# Altium PCB STM32F_Board_PCB.PcbDoc (part 1 of 2)
Units mm, origin at the board's own origin, x right, y up, seen from the top; angles counter-clockwise.
Board outline 53.26 x 36.83 mm, 2 copper layers (Top Layer, Bottom Layer), stack 1.549 mm thick; 46 components, 35 nets, 187 pads, 21 vias.
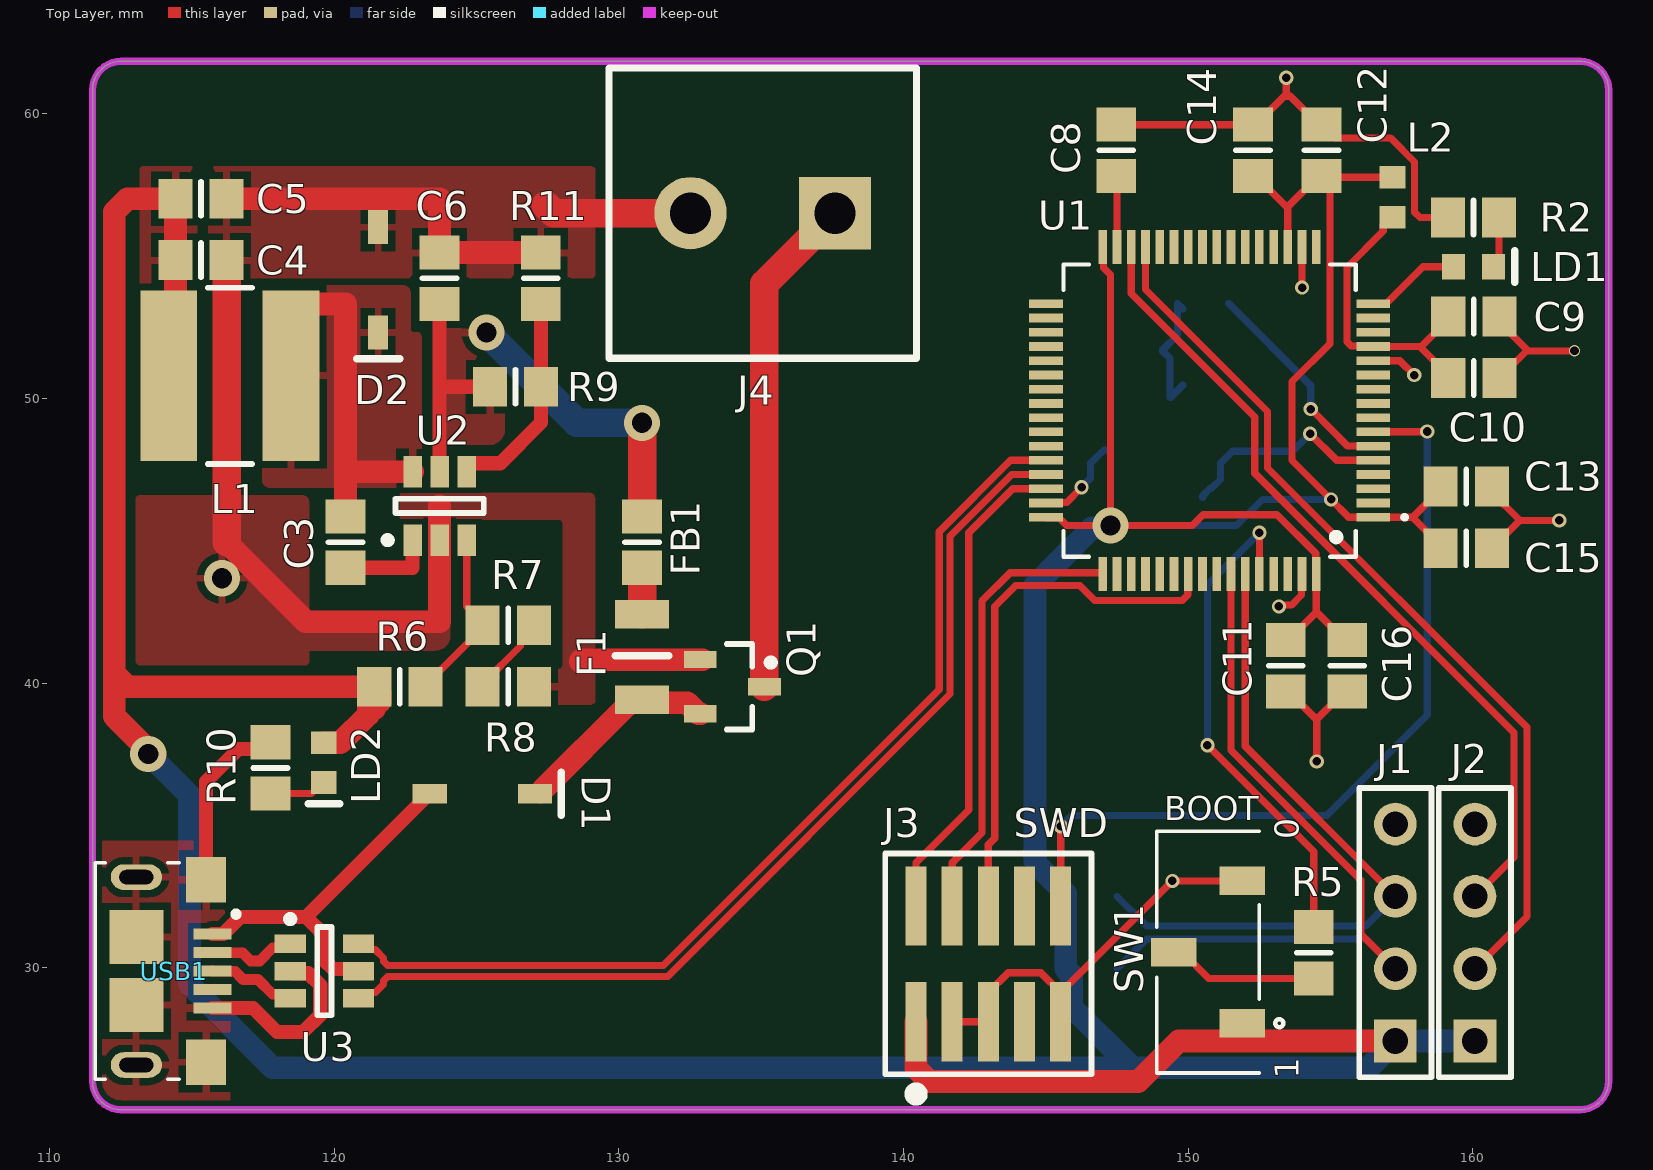
[diagram p0: Top Layer view]
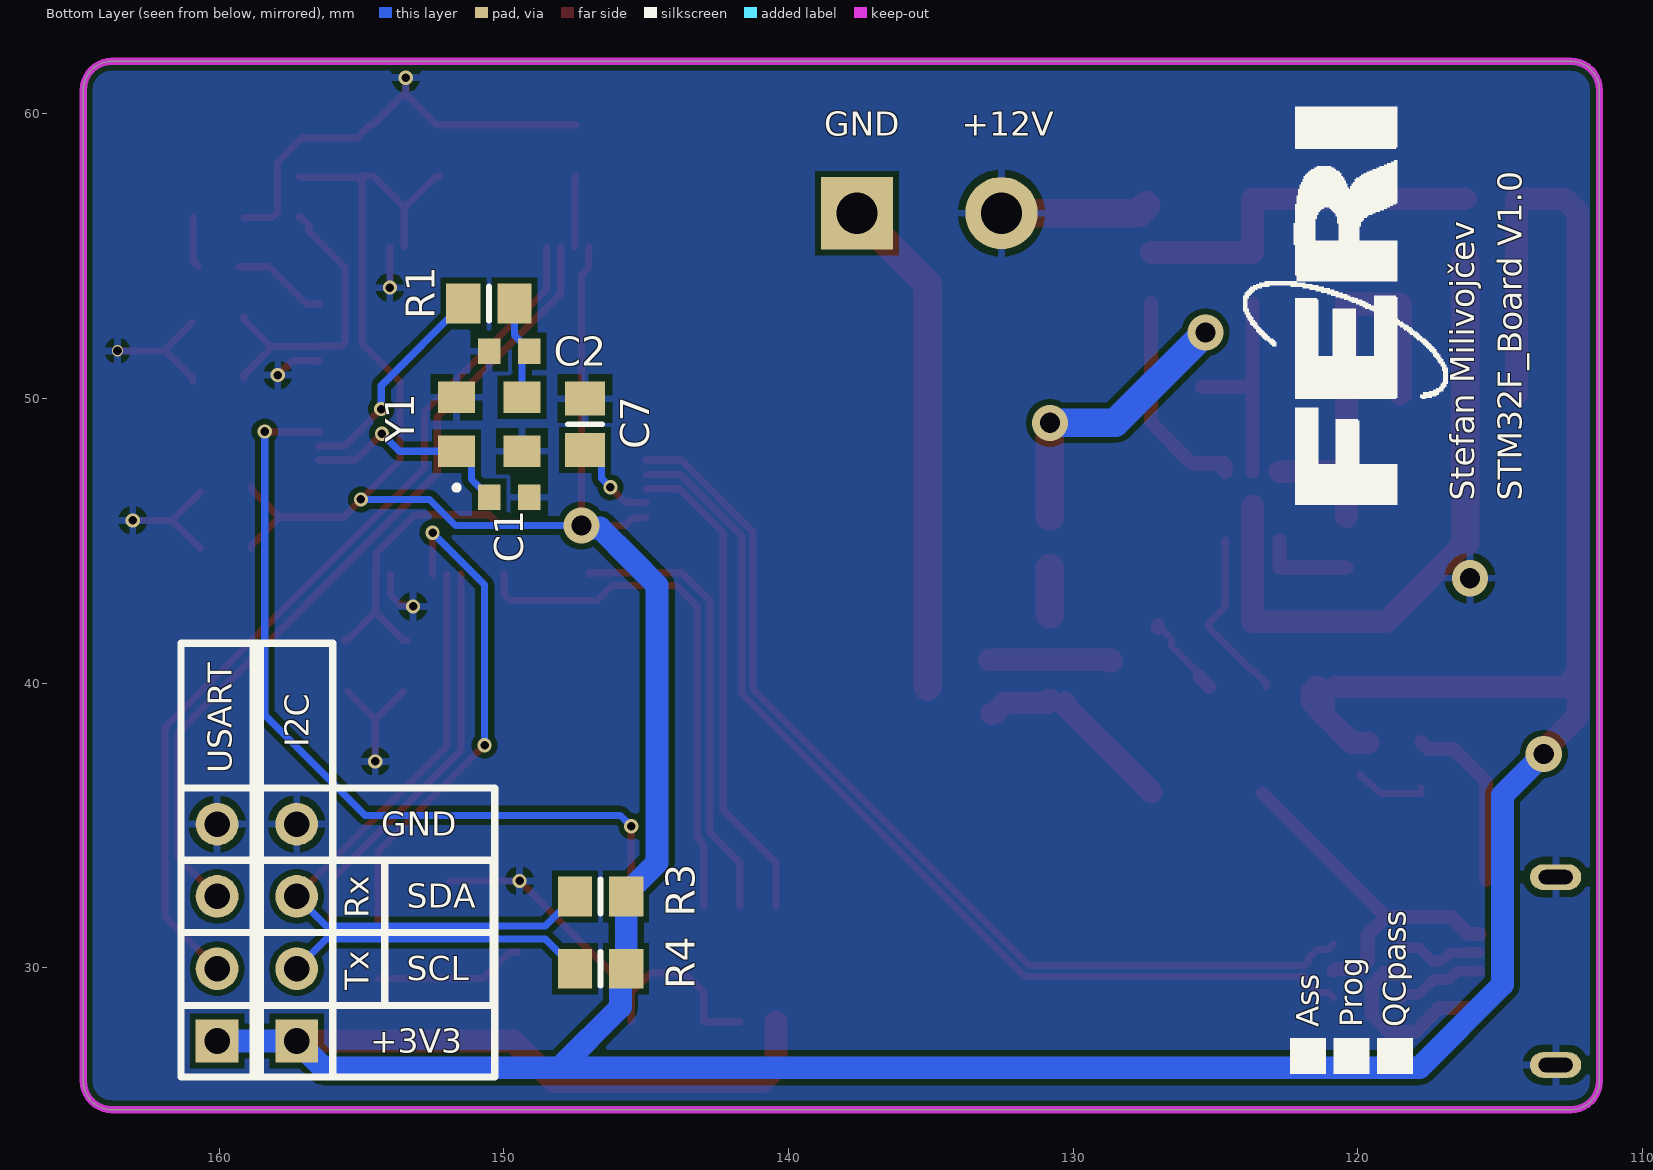
[diagram p1: Bottom Layer view, seen from below]
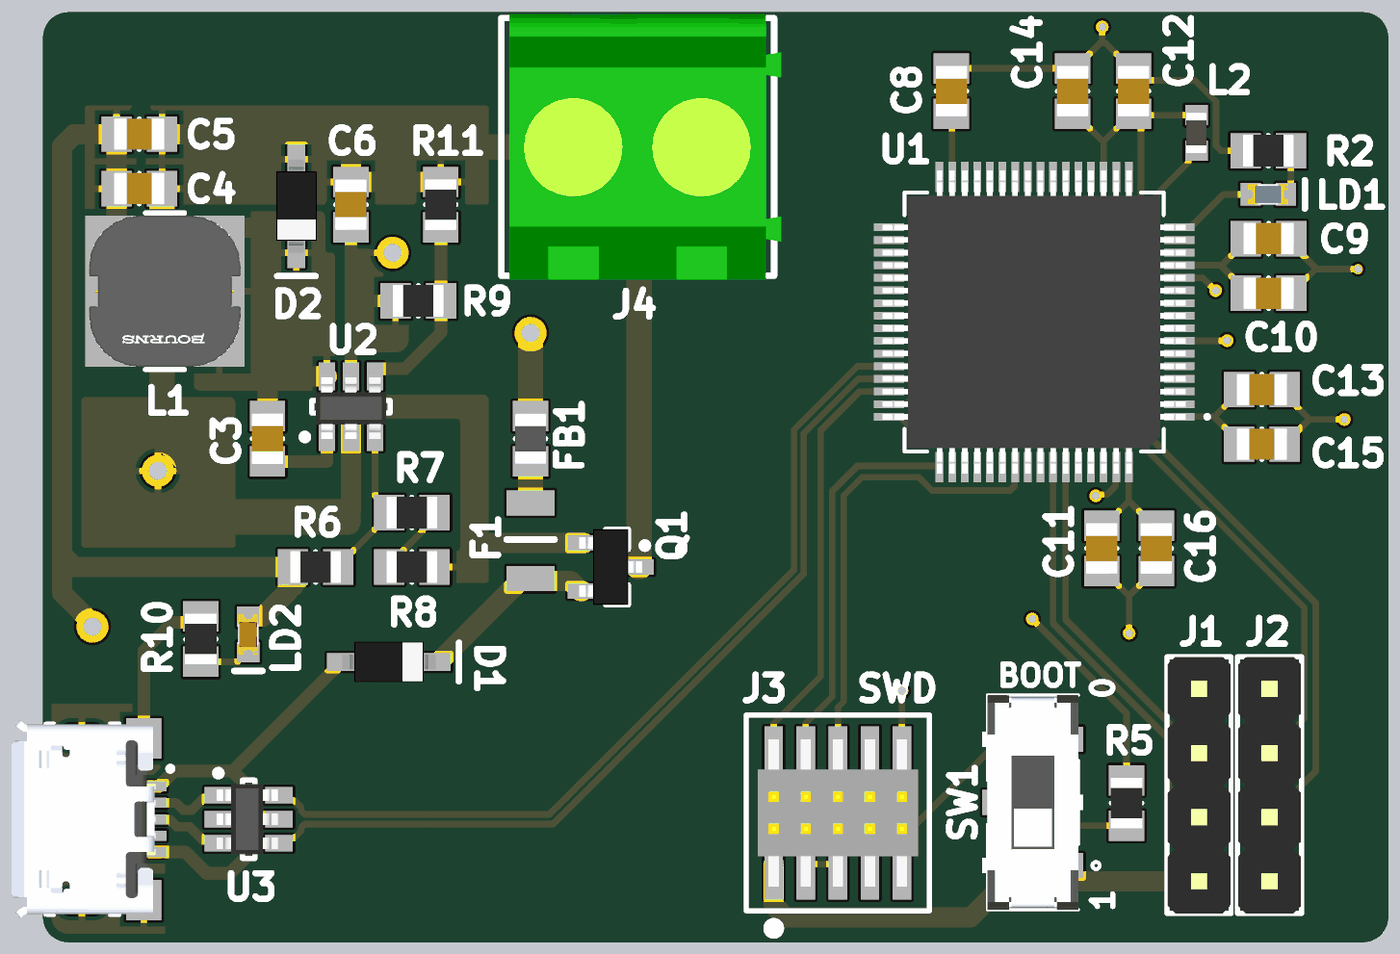
[diagram p2: 3D render of the assembled board from above, using the file's embedded part models]
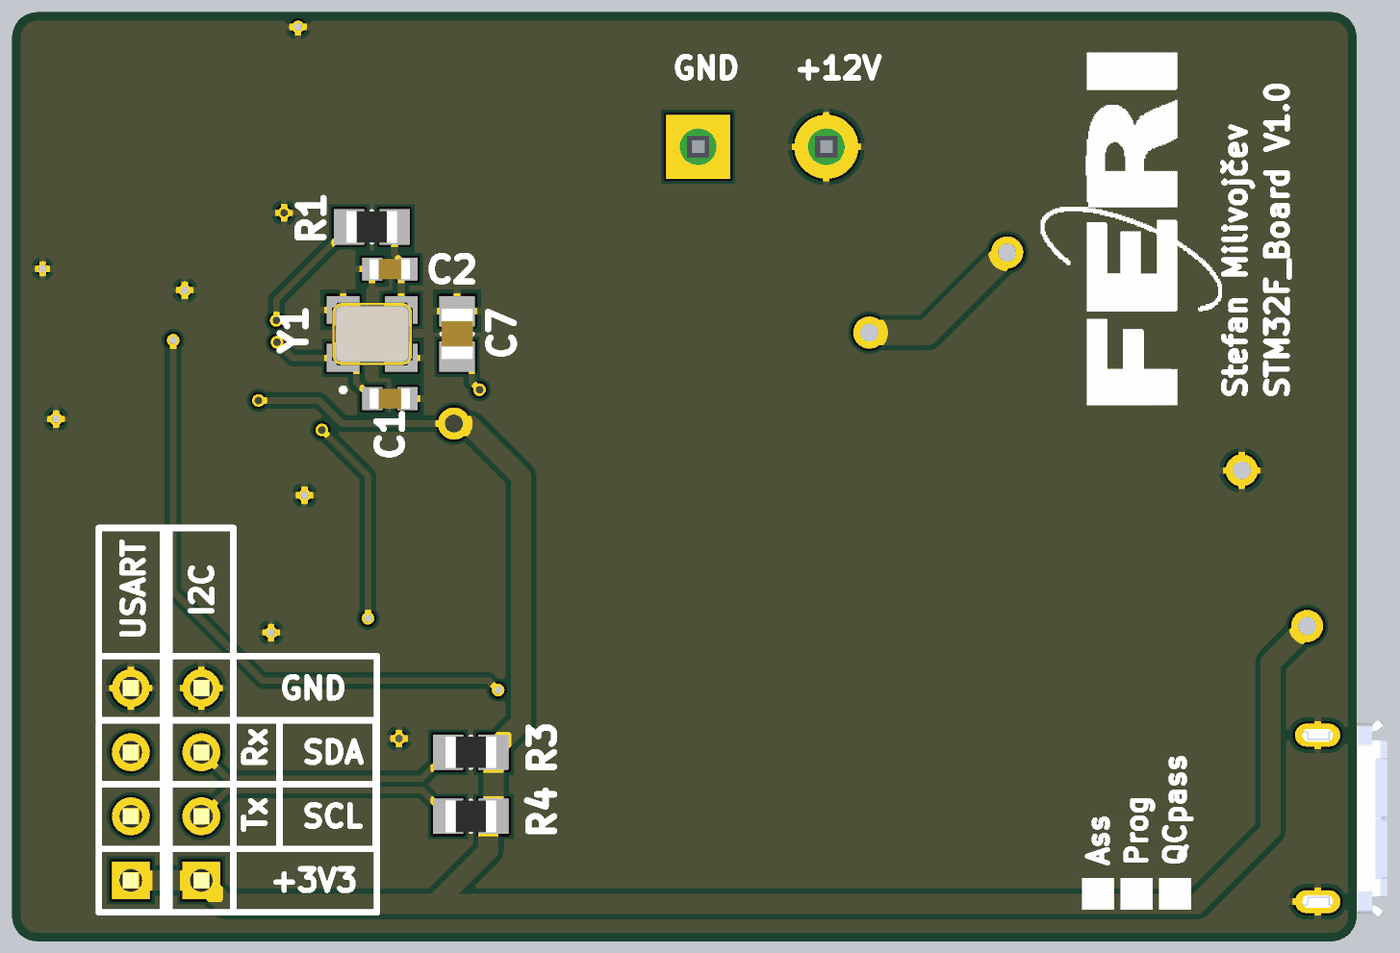
[diagram p3: 3D render of the assembled board from below, using the file's embedded part models]

## Layer stack, top to bottom
Top Solder: solder mask 0.0254, SM-001, Dk 4
Top Layer: signal copper 0.035
Dielectric 1: dielectric 1.4792, FR-4, Dk 4.6
Bottom Layer: signal copper 0.035
Bottom Solder: solder mask 0.0254, SM-001, Dk 4

## Board outline
111.506,26.019 111.506,60.849 cw(c112.506,60.849) 112.506,61.849 163.77,61.849 cw(c163.77,60.849) 164.77,60.849 164.77,26.019 cw(c163.77,26.019) 163.77,25.019 112.506,25.019 cw(c112.506,26.019)

## Design rules (kind name [scope] priority, off if disabled: settings)
Clearance [All] p1: gap=0.2 ignorepadtopadclearanceinfootprint=FALSE except(0.127: Arc-Arc Arc-Track Track-Track SMDPad-SMDPad; 0.254: Arc-Via Arc-Hole Track-Via Track-Hole Via-Via; 0.33: Arc-THPad Track-THPad)
DiffPairsRouting [All] p1: maxlimit=0.254 minlimit=0.127 mostfreqgap=0.254 toplayer_minwidth=0.127 toplayer_maxwidth=0.381 toplayer_prefwidth=0.381 bottomlayer_minwidth=0.127 bottomlayer_maxwidth=0.381 bottomlayer_prefwidth=0.381 maxuncoupledlength=12.7
HoleSize [All] p1: absolutevalues=TRUE maxlimit=5 minlimit=0.2 maxpercent=80.000 minpercent=20.000
MinimumSolderMaskSliver [All] p1: minsoldermaskwidth=0.045
PolygonConnect [All] p1: connectstyle=Relief reliefconductorwidth=0.254 reliefentries=4 polygonreliefangle="90 Angle" airgapwidth=0.254
RoutingVias [All] p1: holewidth=0.711 width=1.27 viastyle="Through Hole" minholewidth=0.2 minwidth=0.4 maxholewidth=0.711 maxwidth=1.27
SilkToSilkClearance [All] p1: silktosilkclearance=0.15
SilkToSolderMaskClearance [IsPad] p1: minsilkscreentomaskgap=0.15 clearancetoexposedcopper=TRUE
SolderMaskExpansion [All] p1: expansion=0.102 istentingtop=FALSE
Width [All] p1: maxlimit=1 minlimit=0.127 preferedwidth=0.254
25 further rules are at their usual default settings.

## Classes and differential pairs
component class STM32F_Board_Schematic: C1 C2 J1 J2 J3 LD1 R1 R2 R3 R4 R5 SW1 U1 Y1
component class STM32F_Board_Schematic_PowerAndUSB: C3 C4 C5 C6 C7 C8 C9 C10 C11 C12 C13 C14 C15 C16 D1 D2 F1 FB1 J4 L1 L2 LD2 Q1 R6 R7 R8 R9 R10 R11 U2 U3 USB1
differential pair USB_IN: +USB_IN_P -USB_IN_N
differential pair USB_DATA: +USB_DATA_P -USB_DATA_N

## Components (designator, comment, footprint, x,y, rotation, side; value= is the part's Value field where it differs from the comment)
C1 "12pF" Capacitor_0603IMP 149.806,46.533 r0 bottom
C2 "12pF" Capacitor_0603IMP 149.806,51.664 r0 bottom
C3 "10nF" Capacitor_0805IMP 120.396,44.958 r270 top
C4 "10uF" Capacitor_0805IMP 115.316,54.864 r180 top
C5 "10uF" Capacitor_0805IMP 115.316,57.023 r180 top
C6 "10uF" Capacitor_0805IMP 123.698,54.229 r270 top
C7 "2.2uF" Capacitor_0805IMP 147.142,49.098 r270 bottom
C8 "2.2uF" Capacitor_0805IMP 147.472,58.725 r270 top
C9 "1uF" Capacitor_0805IMP 160.034,52.883 r180 top
C10 "10nF" Capacitor_0805IMP 160.034,50.724 r180 top
C11 "4.7uF" Capacitor_0805IMP 153.424,40.615 r90 top
C12 "100nF" Capacitor_0805IMP 154.686,58.725 r270 top
C13 "100nF" Capacitor_0805IMP 159.766,46.907 r180 top
C14 "100nF" Capacitor_0805IMP 152.273,58.725 r270 top
C15 "100nF" Capacitor_0805IMP 159.766,44.744 r180 top
C16 "100nF" Capacitor_0805IMP 155.586,40.615 r270 top
D1 "1N5819HW-7-F" SOD-123 123.351,36.119 r0 top
D2 "1N5819HW-7-F" SOD-123 121.539,56.024 r270 top
F1 "250mA" PTCFuse_1206IMP 130.81,39.418 r90 top
FB1 "600R" FerriteBead_0805IMP 130.81,44.958 r90 top
J1 "Header_Male_1x4" HDR1X4 157.277,27.432 r90 top
J2 "Header_Male_1x4" HDR1X4 160.071,27.432 r90 top
J3 "SWD" SAMTEC-FTS-105-01-X-DV 142.977,30.141 r0 top
J4 "MC000048" Screw_Terminal_1x2 135.052,56.515 r180 top
L1 "10uH" BournsInductor 116.332,50.8 r180 top
L2 "39nH" Inductor_0603IMP 157.175,57.074 r270 top
LD1 "Blue" LED_0603IMP_BLUE 160.02,54.635 r0 top
LD2 "Red" LED_0603IMP_RED 119.634,37.211 r270 top
Q1 "AO3401A" SOT23_N 133.985,39.878 r0 top
R1 "47R" Resistor_0805IMP 150.52,53.34 r0 bottom
R2 "1.5kR" Resistor_0805IMP 160.02,56.363 r0 top
R3 "2.2kR" Resistor_0805IMP 146.598,32.512 r180 bottom
R4 "2.2kR" Resistor_0805IMP 146.598,29.972 r180 bottom
R5 "10kR" Resistor_0805IMP 154.407,30.531 r270 top
R6 "47kR" Resistor_0805IMP 122.301,39.878 r180 top
R7 "15kR" Resistor_0805IMP 126.111,42.037 r180 top
R8 "270R" Resistor_0805IMP 126.111,39.878 r180 top
R9 "100kR" Resistor_0805IMP 126.365,50.419 r180 top
R10 "1kR" Resistor_0805IMP 117.754,37.024 r270 top
R11 "68kR" Resistor_0805IMP 127.254,54.229 r270 top
SW1 "SPDT" SW_JS102011JCQN 150.698,30.556 r90 top
U1 "STM32F405RGT6" LQFP64-10x10mm 150.749,49.581 r180 top
U2 "MP2359DJ-LF-P" SOT23-6_N 123.698,46.228 r90 top
U3 "USBLC6-2SC6" SOT23-6_N 119.649,29.89 r0 top
USB1 "Micro B" FCI_10118193-0001LF 113.045,29.89 r270 top
Y1 "16MHz" Oscillator_3225 150.506,49.098 r180 bottom

## Footprints (in the part's own frame and the unit in brackets; to place one, negate y for a bottom-side part, rotate by r counter-clockwise, add the part's x,y. Pads: shape width x height; smd on the part's side, far side on the other; paste and mask are expansions set on the pad)
BournsInductor [mm]
  rect 2x6 smd paste+0 mask+0: 1(-2.15,0) 2(2.15,0)
  silkscreen extent -0.77,-3.1 0.77,3.1, body extent -3.25,-3.2 3.25,3.2, height 0.25
Capacitor_0603IMP [mm] "Chip Capacitor, Body 1.6x0.8mm, IPC High Density"
  rect 0.8x0.9 smd: 1(-0.7,0) 2(0.7,0)
  body extent -0.8,-0.4 0.8,0.4, height 0.9
Capacitor_0805IMP [mm] "Chip Resistor, Body 2.0x1.2mm, IPC Medium Density"
  rect 1.2x1.4 smd: 1(-0.9,0) 2(0.9,0)
  silkscreen extent 0,-0.6 0,0.6, body extent -1,-0.62 1,0.62, height 1
FCI_10118193-0001LF [mm]
  rect 0.4x1.35 smd: 1(-1.3,2.675) 2(-0.65,2.675) 3(0,2.675) 4(0.65,2.675) 5(1.3,2.675)
  rect 1.6x1.4 smd: S1(-3.2,2.45) S2(3.2,2.45)
  rect 1.9x1.9 smd: S3(1.2,0) S4(-1.2,0)
  oval 0.9x1.8 hole 0.5 slot 1.2 at 90 deg: S5(-3.3,0) S6(3.3,0)
  silkscreen extent -3.8,-1.45 3.8,3.6, body extent -3.93,-2.79 3.93,2.92, height 2.84
FerriteBead_0805IMP [mm] "Chip Resistor, Body 2.0x1.2mm, IPC Medium Density"
  rect 1.2x1.4 smd: 1(-0.9,0) 2(0.9,0)
  silkscreen extent 0,-0.6 0,0.6, body extent -1,-0.62 1,0.62, height 1.05
HDR1X4 [mm] "Connector; Header; 4 Position"
  rect 1.5x1.5 hole 0.9: 1(0,0)
  round 1.5 hole 0.9: 2(2.54,0) 3(5.08,0) 4(7.62,0)
  silkscreen extent -1.27,-1.27 8.89,1.27, body extent -1.27,-1.24 8.89,1.25, height 8.54
Inductor_0603IMP [mm] "Chip Capacitor, Body 1.6x0.8mm, IPC High Density"
  rect 0.8x0.9 smd: 1(-0.7,0) 2(0.7,0)
  body extent -0.8,-0.4 0.8,0.4, height 0.8
LED_0603IMP_BLUE [mm] "Chip Capacitor, Body 1.6x0.8mm, IPC High Density"
  rect 0.8x0.9 smd: 1(-0.7,0) 2(0.7,0)
  silkscreen extent 1.45,-0.56 1.45,0.56, body extent -0.8,-0.4 0.8,0.4, height 0.6
LED_0603IMP_RED [mm] "Chip Capacitor, Body 1.6x0.8mm, IPC High Density"
  rect 0.8x0.9 smd: 1(-0.7,0) 2(0.7,0)
  silkscreen extent 1.45,-0.56 1.45,0.56, body extent -0.8,-0.4 0.8,0.4, height 0.6
LQFP64-10x10mm [mm]
  rect 1.194x0.305 smd paste+0 mask+0: 1(-5.75,3.75) 2(-5.75,3.25) 3(-5.75,2.75) 4(-5.75,2.25) 5(-5.75,1.75) 6(-5.75,1.25) 7(-5.75,0.75) 8(-5.75,0.25) 9(-5.75,-0.25) 10(-5.75,-0.75) 11(-5.75,-1.25) 12(-5.75,-1.75) 13(-5.75,-2.25) 14(-5.75,-2.75) 15(-5.75,-3.25) 16(-5.75,-3.75) 33(5.75,-3.75) 34(5.75,-3.25) 35(5.75,-2.75) 36(5.75,-2.25) 37(5.75,-1.75) 38(5.75,-1.25) 39(5.75,-0.75) 40(5.75,-0.25) 41(5.75,0.25) 42(5.75,0.75) 43(5.75,1.25) 44(5.75,1.75) 45(5.75,2.25) 46(5.75,2.75) 47(5.75,3.25) 48(5.75,3.75)
  rect 0.305x1.194 smd paste+0 mask+0: 17(-3.75,-5.75) 18(-3.25,-5.75) 19(-2.75,-5.75) 20(-2.25,-5.75) 21(-1.75,-5.75) 22(-1.25,-5.75) 23(-0.75,-5.75) 24(-0.25,-5.75) 25(0.25,-5.75) 26(0.75,-5.75) 27(1.25,-5.75) 28(1.75,-5.75) 29(2.25,-5.75) 30(2.75,-5.75) 31(3.25,-5.75) 32(3.75,-5.75) 49(3.75,5.75) 50(3.25,5.75) 51(2.75,5.75) 52(2.25,5.75) 53(1.75,5.75) 54(1.25,5.75) 55(0.75,5.75) 56(0.25,5.75) 57(-0.25,5.75) 58(-0.75,5.75) 59(-1.25,5.75) 60(-1.75,5.75) 61(-2.25,5.75) 62(-2.75,5.75) 63(-3.25,5.75) 64(-3.75,5.75)
  silkscreen extent -6.93,-5.13 5.13,5.13, body extent -6,-6 6,6, height 1.56
Oscillator_3225 [mm]
  rect 1.3x1.1 smd: 1(-1.15,-0.95) 2(1.15,-0.95) 3(1.15,0.95) 4(-1.15,0.95)
  silkscreen extent -1.2,-2.28 -1.1,-2.17, body extent -1.6,-1.26 1.6,1.24, height 0.6
PTCFuse_1206IMP [mm]
  rect 1x1.9 smd: 1(0,0) 2(3,0)
  silkscreen extent 1.55,-0.95 1.55,0.95, body extent -0.2,-0.85 3.2,0.85, height 0.8
Resistor_0805IMP [mm] "Chip Resistor, Body 2.0x1.2mm, IPC Medium Density"
  rect 1.2x1.4 smd: 1(-0.9,0) 2(0.9,0)
  silkscreen extent 0,-0.6 0,0.6, body extent -1,-0.63 1,0.63, height 0.6
SAMTEC-FTS-105-01-X-DV [mil]
  rect 29.13x109.84 smd: 1(-100,-80) 2(-100,80) 3(-50,-80) 4(-50,80) 5(0,-80) 6(0,80) 7(50,-80) 8(50,80) 9(100,-80) 10(100,80)
  silkscreen extent -143,-191 143,153, body extent -125,-115 125,115, height 170
Screw_Terminal_1x2 [mm]
  rect 2.54x2.54 hole 1.45: 1(-2.54,0)
  round 2.54 hole 1.45: 2(2.54,0)
  silkscreen extent -5.4,-5.1 5.4,5.1, body extent -5.68,-5.25 5.08,5.25, height 14.29
SOD-123 [mm]
  rect 1.2x0.7 smd: 1(0,0) 2(3.7,0)
  silkscreen extent 4.62,-0.76 4.62,0.76, body extent 0,-0.8 3.7,0.8, height 1.27
SOT23-6_N [mm] "SOT23, 6-Leads, Body 2.9x1.6mm, Pitch 0.95mm, Lead Span 2.7mm, IPC Medium Density"
  rect 1.1x0.65 smd: 1(-1.2,0.95) 2(-1.2,0) 3(-1.2,-0.95) 4(1.2,-0.95) 5(1.2,0) 6(1.2,0.95)
  silkscreen extent -1.32,-1.55 0.25,1.95, body extent -1.27,-1.4 1.16,1.4, height 1.09
SOT23_N [mm] "SOT23, 3-Leads, Body 2.9x1.3mm, Pitch 0.95mm, Lead Span 2.3mm - Reverse Pinning, IPC Medium Density"
  rect 1.15x0.6 smd: 1(1.125,0) 2(-1.125,-0.95) 3(-1.125,0.95)
  silkscreen extent -0.2,-1.5 1.48,1.5, body extent -1.25,-1.5 1.25,1.5, height 1.09
SW_JS102011JCQN [mm]
  rect 1x1.6 smd: 1(-2.5,-1.2) 2(0,1.2) 3(2.5,-1.2)
  silkscreen extent -4.25,-2.64 4.25,1.8, body extent -4.25,-2 4.25,2, height 5.39

## Part data
C1 C2: library part C_12pF_0603IMP, "Capacitor; Ceramic; Cap; 12.0pF; Tol 5%; SMT; Vol-Rtg 50V; C0G", Case/Package=0603, Dielectric=C0G, Dielectric Material=Ceramic, Manufacturer=KEMET, Manufacturer Part Number=C0603C120J5GACTU, Max Operating Temperature=125°C, Min Operating Temperature=-55°C, Supplier Part Number 1=1414612, Temperature Coefficient=30ppm/°C, Tolerance=5%, Voltage=50V, Capacitance=12pF, Category="Ceramic Capacitors", ComponentLink1Description=https://datasheet.ciiva.com/28608/1372242-28608539.pdf?src-supplier=Element14, ComponentLink1URL=https://datasheet.ciiva.com/28608/1372242-28608539.pdf?src-supplier=Element14, Depth=0.8mm, Height=0.8mm, Lead Free="Lead Free", Length=1.6mm, Mount="Surface Mount", Packaging="Tape and Reel", Pricing 1="10=0,03410, 100=0,02710, 500=0,01900, 1000=0,01440, 2000=0,01410 (GBP)", Radiation Hardening=No, RoHS=Yes, Stock 1=37802, Supplier 1=Farnell, Termination=SMD/SMT, Voltage Rating (DC)=50V
C3 C10: library part C_10nF_0805IMP, "Ceramic capacitor SMD 0805 10 nF 100 V 10 %", Case Code (Imperial)=0805, Case Code (Metric)=2012, Dielectric=X7R, Manufacturer=Samsung, Manufacturer Part Number=CL21B103KCANNNC, Max Operating Temperature=125°C, Min Operating Temperature=-55°C, Package Quantity=1, Supplier Part Number 1=3013472, Tolerance=10%, Voltage=100V, Capacitance=10nF, Case/Package=0805, Category="Ceramic Capacitors", ComponentLink1Description=https://datasheet.ciiva.com/15195/getdatasheetpartid-494350-15195869.pdf?src-supplier=Verical, ComponentLink1URL=https://datasheet.ciiva.com/15195/getdatasheetpartid-494350-15195869.pdf?src-supplier=Verical, ComponentLink2Description=https://datasheet.ciiva.com/29199/455069-da-01-en-vs-kondensator-0805-29199454.pdf?src-supplier=Conrad, ComponentLink2URL=https://datasheet.ciiva.com/29199/455069-da-01-en-vs-kondensator-0805-29199454.pdf?src-supplier=Conrad, ComponentLink3Description=https://datasheet.ciiva.com/26310/mlcc-catalogdownload2013-eng-26310214.pdf?src-supplier=Distrelec, ComponentLink3URL=https://datasheet.ciiva.com/26310/mlcc-catalogdownload2013-eng-26310214.pdf?src-supplier=Distrelec, ComponentLink4Description=https://datasheet.ciiva.com/16351/cl21b103kcannnc-16351132.pdf?src-supplier=Future+Electronics, ComponentLink4URL=https://datasheet.ciiva.com/16351/cl21b103kcannnc-16351132.pdf?src-supplier=Future+Electronics, Construction=Flat, Contact Plating=Tin, Depth=1.25mm, Height=0.65mm, Length=2mm, Material=Ceramic, Mount="Surface Mount", Packaging="Tape and Reel", Pricing 1="10=0,02170, 100=0,01760, 500=0,01220, 1000=0,00940, 2000=0,00920 (GBP)", Radiation Hardening=No, RoHS=Yes, RoHS Compliant=Yes, Series=CL, Stock 1=1127, Supplier 1=Farnell, Thickness=0.03inch, Voltage Rating=100V, Width=0.049inch
C4 C5 C6: library part C_10uF_0805IMP, "Capacitor, 10 µF, 25 V, 0805 [2012 Metric], ± 20%, X5R", Case Code (Imperial)=0805, Case Code (Metric)=2012, Dielectric=X5R, Manufacturer=Murata, Manufacturer Part Number=GRM21BR61E106MA73L, Max Operating Temperature=85°C, Min Operating Temperature=-55°C, Package Quantity=3000, Resistor Type=Ceramic, Supplier Part Number 1=2611941, Tolerance=20%, Voltage Rating=25V, Capacitance=10uF, Case/Package=0805, Category="Ceramic Capacitors", ComponentLink1Description=http://www.farnell.com/datasheets/2079185.pdf?src-supplier=Farnell, ComponentLink1URL=http://www.farnell.com/datasheets/2079185.pdf?src-supplier=Farnell, ComponentLink2Description=http://www.mouser.com/ds/2/281/c02e-2905.pdf?src-supplier=Mouser, ComponentLink2URL=http://www.mouser.com/ds/2/281/c02e-2905.pdf?src-supplier=Mouser, ComponentLink3Description=http://components.arrow.com/part/dataview/0323_03061623?src-supplier=Arrow+Europe, ComponentLink3URL=http://components.arrow.com/part/dataview/0323_03061623?src-supplier=Arrow+Europe, ComponentLink4Description=https://search.murata.co.jp/Ceramy/image/img/A01X/G101/ENG/GRM21BR61E106MA73-01.pdf?src-supplier=Digi-Key, ComponentLink4URL=https://search.murata.co.jp/Ceramy/image/img/A01X/G101/ENG/GRM21BR61E106MA73-01.pdf?src-supplier=Digi-Key, ComponentLink5Description=http://www.farnell.com/datasheets/2079185.pdf?src-supplier=Element14, ComponentLink5URL=http://www.farnell.com/datasheets/2079185.pdf?src-supplier=Element14, Depth=1.25mm, Height=1.25mm, Lead Free="Lead Free", Length=2mm, Mount="Surface Mount", Packaging="Tape and Reel", Pricing 1="10=0,13100, 100=0,09480, 500=0,06230, 2500=0,04730, 7500=0,03960, 15000=0,03940, 75000=0,03630, 150000=0,03560 (GBP)", REACH SVHC="No SVHC", RoHS=Yes, RoHS Compliant=Yes, Stock 1=205597, Supplier 1=Farnell, Termination=SMD/SMT, Thickness=0.055inch, Voltage Rating (DC)=25V, Weight=0.000335oz, Width=0.049inch
C7 C8: library part C_2.2uF_0805IMP, "Multilayer Ceramic Capacitor, C Series, 2.2 uF,  10%, X7R, 16 V, 0805 [2012 Metric]", Case Code (Imperial)=0805, Case Code (Metric)=2012, Dielectric=X7R, Dielectric Material=Ceramic, Manufacturer=TDK, Manufacturer Part Number=C2012X7R1C225K125AB, Max Operating Temperature=125°C, Min Operating Temperature=-55°C, Package Quantity=2000, Supplier Part Number 1=1907345, Tolerance=10%, Voltage=16V, Capacitance=2.2uF, Case/Package=0805, Category="Ceramic Capacitors", ComponentLink1Description=https://datasheet.ciiva.com/24219/c2012x7r1c225k125ab-265065-24219730.pdf?src-supplier=Mouser, ComponentLink1URL=https://datasheet.ciiva.com/24219/c2012x7r1c225k125ab-265065-24219730.pdf?src-supplier=Mouser, ComponentLink2Description=https://datasheet.ciiva.com/11788/0900766b80c1bb00-11788135.pdf?src-supplier=RSComponents, ComponentLink2URL=https://datasheet.ciiva.com/11788/0900766b80c1bb00-11788135.pdf?src-supplier=RSComponents, ComponentLink3Description=https://datasheet.ciiva.com/26834/getdatasheetpartid-736487-26834421.pdf?src-supplier=Verical, ComponentLink3URL=https://datasheet.ciiva.com/26834/getdatasheetpartid-736487-26834421.pdf?src-supplier=Verical, ComponentLink4Description=https://datasheet.ciiva.com/16482/e412-c-16482422.pdf?src-supplier=Future+Electronics, ComponentLink4URL=https://datasheet.ciiva.com/16482/e412-c-16482422.pdf?src-supplier=Future+Electronics, ComponentLink5Description=https://datasheet.ciiva.com/6291/tdkmlcccaprange-6291383.pdf?src-supplier=Digi-Key, ComponentLink5URL=https://datasheet.ciiva.com/6291/tdkmlcccaprange-6291383.pdf?src-supplier=Digi-Key, ComponentLink6Description=https://datasheet.ciiva.com/6291/tdkmlcccaprange-6291384.pdf?src-supplier=Digi-Key, ComponentLink6URL=https://datasheet.ciiva.com/6291/tdkmlcccaprange-6291384.pdf?src-supplier=Digi-Key, ComponentLink7Description=https://datasheet.ciiva.com/22648/1796654-22648712.pdf?src-supplier=Element14, ComponentLink7URL=https://datasheet.ciiva.com/22648/1796654-22648712.pdf?src-supplier=Element14, ComponentLink8Description=https://datasheet.ciiva.com/6291/tdkmlcccaprange-6291450.pdf?src-supplier=Digi-Key, ComponentLink8URL=https://datasheet.ciiva.com/6291/tdkmlcccaprange-6291450.pdf?src-supplier=Digi-Key, ComponentLink9Description=https://datasheet.ciiva.com/22694/1796654-22694143.pdf?src-supplier=Element14, ComponentLink9URL=https://datasheet.ciiva.com/22694/1796654-22694143.pdf?src-supplier=Element14, Construction=Flat, Depth=1.25mm, Height=1.25mm, Lead Free="Lead Free", Length=2mm, Mount="Surface Mount", Number of Pins=2, Packaging="Tape and Reel", Pricing 1="5=0,09370, 50=0,06860, 250=0,05490, 500=0,04120, 1000=0,03440 (GBP)", Radiation Hardening=No, REACH SVHC="No SVHC", Resistor Type=Ceramic, RoHS=Yes, RoHS Compliant=Yes, Series=C, Stock 1=7190, Supplier 1=Farnell, Termination=SMD/SMT, Thickness=0.057inch, Voltage Rating=16V, Voltage Rating (DC)=16V, Weight=0.000194oz, Width=1.25mm
C9: library part C_1uF_0805IMP, "Cap Ceramic 1uF 16V Y5V -20% to 80% SMD 0805 85C Paper T/R", Case Code (Imperial)=0805, Case Code (Metric)=2012, Dielectric=Y5V, Manufacturer="Walsin Technologies", Manufacturer Part Number=0805F105Z160CT, Max Operating Temperature=85°C, Min Operating Temperature=-25°C, Supplier Part Number 1=2496995, Tolerance=80%, Voltage Rating=16V, Capacitance=1uF, Case/Package=0805, Category=Uncategorized, ComponentLink1Description=http://components.arrow.com/part/dataview/0323_00651673?src-supplier=Arrow+Europe, ComponentLink1URL=http://components.arrow.com/part/dataview/0323_00651673?src-supplier=Arrow+Europe, ComponentLink2Description=http://www.farnell.com/datasheets/1958513.pdf?src-supplier=Farnell, ComponentLink2URL=http://www.farnell.com/datasheets/1958513.pdf?src-supplier=Farnell, ComponentLink3Description=https://www.verical.com/server-webapp/html/getDatasheet?partID=734690&src-supplier=Verical, ComponentLink3URL=https://www.verical.com/server-webapp/html/getDatasheet?partID=734690&src-supplier=Verical, ComponentLink4Description=http://www.farnell.com/datasheets/1958513.pdf?src-supplier=Element14, ComponentLink4URL=http://www.farnell.com/datasheets/1958513.pdf?src-supplier=Element14, Depth=1.25mm, Length=2mm, Packaging="Tape and Reel", Pricing 1="10=0,07690, 100=0,05190, 500=0,02270, 1000=0,01600, 2000=0,01560 (GBP)", Radiation Hardening=No, REACH SVHC=Unknown, RoHS=Yes, RoHS Compliant=Yes, Stock 1=3816, Supplier 1=Farnell, Voltage Rating (DC)=16V
C11: library part C_4.7uF_0805IMP, "Cap Ceramic 4.7uF 6.3V X5R 10% SMD 0805 85C", Case Code (Imperial)=0805, Case Code (Metric)=2012, Dielectric=X5R, Dielectric Material=Ceramic, Manufacturer=KEMET, Manufacturer Part Number=C0805C475K9PACTU, Max Operating Temperature=85°C, Min Operating Temperature=-55°C, Package Quantity=1, Supplier Part Number 1=9227857, Tolerance=10%, Voltage=6.3V, Capacitance=4.7uF, Case/Package=0805, Category="Ceramic Capacitors", ComponentLink1Description=https://datasheet.ciiva.com/7842/1847039-7842373.pdf?src-supplier=Element14, ComponentLink1URL=https://datasheet.ciiva.com/7842/1847039-7842373.pdf?src-supplier=Element14, ComponentLink2Description=https://datasheet.ciiva.com/7842/1847039-7842374.pdf?src-supplier=Element14, ComponentLink2URL=https://datasheet.ciiva.com/7842/1847039-7842374.pdf?src-supplier=Element14, ComponentLink3Description=https://datasheet.ciiva.com/28614/kem-c1006-x5r-smd-28614764.pdf?src-supplier=Element14, ComponentLink3URL=https://datasheet.ciiva.com/28614/kem-c1006-x5r-smd-28614764.pdf?src-supplier=Element14, ComponentLink4Description=https://datasheet.ciiva.com/28682/1789732-28682365.pdf?src-supplier=Element14, ComponentLink4URL=https://datasheet.ciiva.com/28682/1789732-28682365.pdf?src-supplier=Element14, Construction=Flat, Depth=1.25mm, Dissipation Factor=5%, Height=1.25mm, Lead Free="Lead Free", Lead Pitch=0.75mm, Length=2mm, Mount="Surface Mount", Number of Pins=2, Packaging="Tape and Reel", Pricing 1="5=0,11300, 50=0,07140, 250=0,05740, 500=0,04340, 1000=0,03480 (GBP)", Radiation Hardening=No, REACH SVHC="No SVHC", RoHS=Yes, RoHS Compliant=Yes, Series=C, Stock 1=9662, Supplier 1=Farnell, Termination=SMD/SMT, Thickness=0.055inch, Voltage Rating=6.3V, Voltage Rating (DC)=6.3V, Width=1.2mm
C12 C13 C14 C15 C16: library part C_100nF_0805IMP, "CAP CER 0.1UF 25V X7R 0805", Case Code (Imperial)=0805, Case Code (Metric)=2012, Dielectric=X7R, Manufacturer=Samsung, Manufacturer Part Number=CL21B104KACNNNC, Max Operating Temperature=125°C, Min Operating Temperature=-55°C, Package Quantity=1, Supplier Part Number 1=3013475, Tolerance=10%, Voltage=25V, Capacitance=100nF, Case/Package=0805, Category="Ceramic Capacitors", ComponentLink1Description=https://datasheet.ciiva.com/25801/cl21b104kacnnnc-25801824.pdf?src-supplier=Digi-Key, ComponentLink1URL=https://datasheet.ciiva.com/25801/cl21b104kacnnnc-25801824.pdf?src-supplier=Digi-Key, ComponentLink2Description=https://datasheet.ciiva.com/15216/getdatasheetpartid-355204-15216236.pdf?src-supplier=Verical, ComponentLink2URL=https://datasheet.ciiva.com/15216/getdatasheetpartid-355204-15216236.pdf?src-supplier=Verical, Contact Plating=Tin, Depth=1.25mm, Height=0.85mm, Length=2mm, Mount="Surface Mount", Packaging="Tape and Reel", Pricing 1="10=0,02200, 100=0,01790, 500=0,01260, 1000=0,01050, 2000=0,00940 (GBP)", Radiation Hardening=No, RoHS=Yes, Stock 1=7683, Supplier 1=Farnell, Thickness=0.037inch, Voltage Rating=25V, Width=0.049inch
D1 D2: library part SCKY_Diode, "1N5819HW-7-F - DIODE, SCKY RECTI, 1A, 40V, SOD123", Average Rectified Current=1A, Capacitance=110pF, Case/Package=SOD-123-2, Forward Voltage=450mV, Manufacturer=Diodes, Max Forward Surge Current (Ifsm)=25A, Max Operating Temperature=125°C, Max Power Dissipation=450mW, Max Repetitive Reverse Voltage (Vrrm)=40V, Max Reverse Current=50uA, Min Operating Temperature=-65°C, Package Quantity=3000, Supplier Part Number 1=1773475, Category="Schottky Diodes", ComponentLink1Description=https://datasheet.ciiva.com/16303/ds30217-16303296.pdf?src-supplier=Future+Electronics, ComponentLink1URL=https://datasheet.ciiva.com/16303/ds30217-16303296.pdf?src-supplier=Future+Electronics, ComponentLink2Description=https://datasheet.ciiva.com/27092/1538419-27092484.pdf?src-supplier=Jameco, ComponentLink2URL=https://datasheet.ciiva.com/27092/1538419-27092484.pdf?src-supplier=Jameco, ComponentLink3Description=https://datasheet.ciiva.com/912/ds30217-912801.pdf?src-supplier=Digi-Key, ComponentLink3URL=https://datasheet.ciiva.com/912/ds30217-912801.pdf?src-supplier=Digi-Key, ComponentLink4Description=https://datasheet.ciiva.com/1177/ds30217-1177089.pdf?src-supplier=Element14, ComponentLink4URL=https://datasheet.ciiva.com/1177/ds30217-1177089.pdf?src-supplier=Element14, ComponentLink5Description=https://datasheet.ciiva.com/912/ds30217-912802.pdf?src-supplier=Digi-Key, ComponentLink5URL=https://datasheet.ciiva.com/912/ds30217-912802.pdf?src-supplier=Digi-Key, ComponentLink6Description=https://datasheet.ciiva.com/912/ds30217-912803.pdf?src-supplier=Digi-Key, ComponentLink6URL=https://datasheet.ciiva.com/912/ds30217-912803.pdf?src-supplier=Digi-Key, ComponentLink7Description=https://datasheet.ciiva.com/8303/ds30217-8303132.pdf?src-supplier=Avnet, ComponentLink7URL=https://datasheet.ciiva.com/8303/ds30217-8303132.pdf?src-supplier=Avnet, ComponentLink8Description=https://datasheet.ciiva.com/25919/ds30217-25919644.pdf?src-supplier=Avnet+Europe, ComponentLink8URL=https://datasheet.ciiva.com/25919/ds30217-25919644.pdf?src-supplier=Avnet+Europe, Contact Plating=Tin,Matte, Current Rating=1A, Element Configuration=Single, Forward Current=1A, Height=1.25mm, Lead Free="Lead Free", Length=2.85mm, Manufacturer Part Number=1N5819HW-7-F, Max Reverse Voltage (DC)=40V, Number of Pins=2, Output Current=1A, Packaging="Tape and Reel", Peak Non-Repetitive Surge Current=25A, Polarity=Standard, Pricing 1="5=0,38900, 10=0,25100, 100=0,12400, 500=0,09550, 1000=0,05770, 5000=0,05110 (GBP)", Radiation Hardening=No, REACH SVHC="No SVHC", RoHS=Yes, RoHS Compliant=Yes, Series=-, Stock 1=15501, Supplier 1=Farnell, Termination=SMD/SMT, Voltage Rating (DC)=40V, Weight=0.000353oz, Width=1.7mm
F1: library part PTC_FUSE_1206IMP, "FUSE, RESETTABLE PTC, 16VDC, 0.25A, SMD", Case Code (Imperial)=1206, Case Code (Metric)=3216, Manufacturer=Bel, Manufacturer Part Number=0ZCJ0025FF2E, Max Current Rating=100A, Package Quantity=1, Supplier Part Number 1=2848526, Trip Current=500mA, Case/Package=1206, Category="PTC Resettable Fuses", ComponentLink1Description=https://datasheet.ciiva.com/18550/0zcj-18550537.pdf?src-supplier=Digi-Key, ComponentLink1URL=https://datasheet.ciiva.com/18550/0zcj-18550537.pdf?src-supplier=Digi-Key, ComponentLink2Description=https://datasheet.ciiva.com/18550/0zcj-18550538.pdf?src-supplier=Digi-Key, ComponentLink2URL=https://datasheet.ciiva.com/18550/0zcj-18550538.pdf?src-supplier=Digi-Key, ComponentLink3Description=https://datasheet.ciiva.com/18550/0zcj-18550539.pdf?src-supplier=Digi-Key, ComponentLink3URL=https://datasheet.ciiva.com/18550/0zcj-18550539.pdf?src-supplier=Digi-Key, Hold Current=250mA, Lead Free="Lead Free", Packaging="Tape and Reel", Pricing 1="1=0,09850, 25=0,08680, 50=0,07400, 100=0,06160, 250=0,06060, 500=0,05090, 1000=0,04460 (GBP)", RoHS=Yes, Stock 1=2004, Supplier 1=Farnell, Time to Trip=0.08s
FB1: library part FerriteBead_600R_0805IMP, "FERRITE BEAD, 600 OHM IMPEDANCE, 500mA 0805 1LN", Case Code (Imperial)=0805, Case Code (Metric)=2012, Case/Package=SMD/SMT, Current=500mA, DC Resistance (DCR)=300mR, Manufacturer="Wurth Electronics", Manufacturer Part Number=7427920415, Max Operating Temperature=125°C, Min Operating Temperature=-55°C, Package Quantity=1, Supplier Part Number 1=1800363, Test Frequency=100MHz, Tolerance=25%, Category="Ferrite Beads and Chips", ComponentLink1Description=https://datasheet.ciiva.com/1013/7427920415-1013408.pdf?src-supplier=Digi-Key, ComponentLink1URL=https://datasheet.ciiva.com/1013/7427920415-1013408.pdf?src-supplier=Digi-Key, ComponentLink2Description=https://datasheet.ciiva.com/1474/530514-1474948.pdf?src-supplier=Farnell, ComponentLink2URL=https://datasheet.ciiva.com/1474/530514-1474948.pdf?src-supplier=Farnell, ComponentLink3Description=https://datasheet.ciiva.com/23762/7427920415-23762918.pdf?src-supplier=Newark, ComponentLink3URL=https://datasheet.ciiva.com/23762/7427920415-23762918.pdf?src-supplier=Newark, ComponentLink4Description=https://datasheet.ciiva.com/4940/7427920415-66029-4940477.pdf?src-supplier=Mouser, ComponentLink4URL=https://datasheet.ciiva.com/4940/7427920415-66029-4940477.pdf?src-supplier=Mouser, ComponentLink5Description=https://datasheet.ciiva.com/30490/0900766b812a665d-30490029.pdf?src-supplier=RSComponents, ComponentLink5URL=https://datasheet.ciiva.com/30490/0900766b812a665d-30490029.pdf?src-supplier=RSComponents, ComponentLink6Description=https://datasheet.ciiva.com/1013/7427920415-1013409.pdf?src-supplier=Digi-Key, ComponentLink6URL=https://datasheet.ciiva.com/1013/7427920415-1013409.pdf?src-supplier=Digi-Key, ComponentLink7Description=https://datasheet.ciiva.com/22711/530514-22711351.pdf?src-supplier=Element14, ComponentLink7URL=https://datasheet.ciiva.com/22711/530514-22711351.pdf?src-supplier=Element14, ComponentLink8Description=https://datasheet.ciiva.com/1126/530514-1126573.pdf?src-supplier=Element14, ComponentLink8URL=https://datasheet.ciiva.com/1126/530514-1126573.pdf?src-supplier=Element14, Current Rating=500mA, Depth=1.2mm, Height=0.9mm, Impedance=600R, Lead Free="Lead Free", Length=2mm, Material=Ferrite, Max Current Rating=500mA, Max DC Current=500mA, Mount="Surface Mount", Number of Lines=1, Number of Pins=2, Packaging="Tape and Reel", Pricing 1="10=0,28700, 100=0,19300, 500=0,14300, 1000=0,12800, 2000=0,12200 (GBP)", REACH SVHC=Unknown, Resistance=300mR, RoHS=Yes, RoHS Compliant=Yes, Series=WE-CBF, Stock 1=13468, Supplier 1=Farnell, Termination=SMD/SMT, Weight=0.000388oz, Width=0.047inch
J1 J2: "MULTICOMP - 2211S-04G - Board-To-Board Connector, 2.54 mm, 4 Contacts, Header, 2211S Series, Through Hole, 1 Rows", Flammability Rating="UL94 V-0", Insulation Resistance=1GR, Manufacturer=Multicomp, Manufacturer Part Number=2211S-04G, Supplier Part Number 1=1593413, Category=Connectors, ComponentLink1Description=https://datasheet.ciiva.com/1433/1518407-1433871.pdf?src-supplier=Element14, ComponentLink1URL=https://datasheet.ciiva.com/1433/1518407-1433871.pdf?src-supplier=Element14, Contact Material="Copper Alloy", Contact Plating=Gold, Gender=Male, Height=0.47inch, Length=0.39inch, Mount="Through Hole", Number of Contacts=4, Number of Rows=1, Pricing 1="50=0,02110, 500=0,01560, 1500=0,01340, 2500=0,01090 (GBP)", REACH SVHC="No SVHC", RoHS=No, RoHS Compliant=No, Stock 1=200994, Supplier 1=Farnell, Termination="Through Hole", Weight=0.1lb, Width=0.25inch
J3: library part Header_1.27mm_male_SMD, "SAMTEC - FTS-105-01-L-DV - CONNECTOR, HEADER, SMT, 1.27MM, 10WAY", Color=Black, Current Rating=1.75A, Manufacturer=Samtec, Manufacturer Part Number=FTS-105-01-L-DV, Max Operating Temperature=125°C, Min Operating Temperature=-55°C, Package Quantity=1, Supplier Part Number 1=1667729, Category="Headers and Wire Housings", ComponentLink1Description=https://datasheet.ciiva.com/25617/0900766b81142f3c-25617158.pdf?src-supplier=RSComponents, ComponentLink1URL=https://datasheet.ciiva.com/25617/0900766b81142f3c-25617158.pdf?src-supplier=RSComponents, ComponentLink2Description=https://datasheet.ciiva.com/22677/1731559-22677531.pdf?src-supplier=Element14, ComponentLink2URL=https://datasheet.ciiva.com/22677/1731559-22677531.pdf?src-supplier=Element14, ComponentLink3Description=https://datasheet.ciiva.com/6881/fts-1xx-xx-xx-xx-xx-mkt-6881558.pdf?src-supplier=Digi-Key, ComponentLink3URL=https://datasheet.ciiva.com/6881/fts-1xx-xx-xx-xx-xx-mkt-6881558.pdf?src-supplier=Digi-Key, ComponentLink4Description=https://datasheet.ciiva.com/26936/getdatasheetpartid-221786-26936875.pdf?src-supplier=Verical, ComponentLink4URL=https://datasheet.ciiva.com/26936/getdatasheetpartid-221786-26936875.pdf?src-supplier=Verical, Connector Type="Male Pin", Contact Material=Bronze, Contact Mating Length=0.12inch, Contact Plating=Gold, Contact Type="Male Pin", Depth=3.42mm, Gender=Male, Housing Color=Black, Housing Material=Polymer, Lead Free="Lead Free", Length=6.35mm, Max Current Rating=1.75A, Mount="Surface Mount", Number of Contacts=10, Number of Positions=10, Number of Rows=2, Orientation=Straight, Packaging=Bulk, Pitch=1.27mm, Pricing 1="1=1,36000, 10=1,18000, 100=1,07000, 250=0,99200, 500=0,83200, 1000=0,71500 (GBP)", Radiation Hardening=No, REACH SVHC="No SVHC", RoHS=Yes, RoHS Compliant=Yes, Row Spacing=0.05inch, Series=FTS, Stock 1=2610, Supplier 1=Farnell, Termination=Solder
J4: library part Screw_Terminal_1x2, "MC000048 Wire-To-Board Terminal Block, 2 Ways, 300 V, 16 A, 26 AWG, 12 AWG", Current Rating=16A, Manufacturer=Multicomp, Supplier Part Number 1=2008019, Voltage Rating=300V, Category="Terminal Blocks", ComponentLink1Description=https://datasheet.ciiva.com/23597/1493498-23597284.pdf?src-supplier=Newark, ComponentLink1URL=https://datasheet.ciiva.com/23597/1493498-23597284.pdf?src-supplier=Newark, ComponentLink2Description=https://datasheet.ciiva.com/7978/1493498-7978870.pdf?src-supplier=Element14, ComponentLink2URL=https://datasheet.ciiva.com/7978/1493498-7978870.pdf?src-supplier=Element14, Connector Type="PCB,Terminal Block", Contact Material=Brass, Contact Plating=Tin, Manufacturer Part Number=MC000048, Mount="Through Hole", Number of Contacts=2, Pricing 1="5=0,29400, 50=0,24400, 150=0,20200, 250=0,17200, 500=0,15000, 1500=0,13300 (GBP)", REACH SVHC="No SVHC", RoHS=Yes, Stock 1=21761, Supplier 1=Farnell, Wire/Cable Gauge=26AWG
L1: library part L_10uH_3A, "BOURNS - SRN6045-100M. - INDUCTOR, SHIELDED, 10UH, 3A, SMD", Case/Package=Nonstandard, Current Rating=2.5A, DC Resistance (DCR)=58.6mR, Inductance Tolerance=20%, Manufacturer=Bourns, Manufacturer Part Number=SRN6045-100M, Max Operating Temperature=125°C, Min Operating Temperature=-40°C, Package Quantity=1, Resistor Type=Wirewound, Saturation Current=3A, Self Resonant Frequency=15MHz, Supplier Part Number 1=2061652, Test Frequency=100kHz, Category="Fixed Inductors", ComponentLink1Description=https://datasheet.ciiva.com/11802/0900766b80fe1f3e-11802575.pdf?src-supplier=RSComponents, ComponentLink1URL=https://datasheet.ciiva.com/11802/0900766b80fe1f3e-11802575.pdf?src-supplier=RSComponents, ComponentLink2Description=https://datasheet.ciiva.com/17284/srn6045-17284746.pdf?src-supplier=Avnet+Europe, ComponentLink2URL=https://datasheet.ciiva.com/17284/srn6045-17284746.pdf?src-supplier=Avnet+Europe, ComponentLink3Description=https://datasheet.ciiva.com/6689/srn6045-6689372.pdf?src-supplier=Digi-Key, ComponentLink3URL=https://datasheet.ciiva.com/6689/srn6045-6689372.pdf?src-supplier=Digi-Key, ComponentLink4Description=https://datasheet.ciiva.com/28561/1875285-28561101.pdf?src-supplier=Element14, ComponentLink4URL=https://datasheet.ciiva.com/28561/1875285-28561101.pdf?src-supplier=Element14, ComponentLink5Description=https://datasheet.ciiva.com/6689/srn6045-6689374.pdf?src-supplier=Digi-Key, ComponentLink5URL=https://datasheet.ciiva.com/6689/srn6045-6689374.pdf?src-supplier=Digi-Key, ComponentLink6Description=https://datasheet.ciiva.com/7849/1875285-7849518.pdf?src-supplier=Element14, ComponentLink6URL=https://datasheet.ciiva.com/7849/1875285-7849518.pdf?src-supplier=Element14, ComponentLink7Description=https://datasheet.ciiva.com/8512/srn6045-8512981.pdf?src-supplier=Avnet, ComponentLink7URL=https://datasheet.ciiva.com/8512/srn6045-8512981.pdf?src-supplier=Avnet, ComponentLink8Description=https://datasheet.ciiva.com/17113/70231653-17113272.pdf?src-supplier=Allied+Electronics, ComponentLink8URL=https://datasheet.ciiva.com/17113/70231653-17113272.pdf?src-supplier=Allied+Electronics, ComponentLink9Description=https://datasheet.ciiva.com/6689/srn6045-6689370.pdf?src-supplier=Digi-Key, ComponentLink9URL=https://datasheet.ciiva.com/6689/srn6045-6689370.pdf?src-supplier=Digi-Key, ComponentLink10Description=https://datasheet.ciiva.com/48691/001056442-da-01-en-mag-abg-leist-ind-srn6045-100m-10uh-smd-48691818.pdf?src-supplier=Conrad, ComponentLink10URL=https://datasheet.ciiva.com/48691/001056442-da-01-en-mag-abg-leist-ind-srn6045-100m-10uh-smd-48691818.pdf?src-supplier=Conrad, Core Material=Ferrite, DC Current=2.5A, Depth=6.2mm, Height=4.5mm, Height - Seated (Max)=0.177inch, Inductance=10uH, Length=6mm, Material=Steel, Max DC Current=2.5A, Military Standard=Not, Mount="Surface Mount", Number of Pins=2, Packaging="Tape and Reel", Pricing 1="1=0,39800, 50=0,26900, 100=0,24000, 250=0,19900, 500=0,19500 (GBP)", REACH SVHC="No SVHC", RMS Current (Irms)=2.5A, RoHS=Yes, RoHS Compliant=Yes, Sample Rate (Hz)=100kHz, Series=SRN6045, Shielding=Shielded, Stock 1=150, Supplier 1=Farnell, Termination=SMD/SMT, Tolerance=20%, Weight=0.027725oz, Width=6mm
L2: library part L_39nH_0603IMP, "Inductor, 39Nh, 1.4Ghz, 0603IMP", Manufacturer=Multicomp, Manufacturer Part Number=MP002916, Supplier Part Number 1=3370581, Pricing 1="10=0,02890, 100=0,02350, 500=0,01720, 1000=0,01310, 2000=0,01120 (GBP)", Stock 1=4070, Supplier 1=Farnell
LD1: library part LED_BLUE_0603IMP, "LED, SMD, 0603, BLUE", Case/Package=1608, Forward Current=20mA, Forward Voltage=3.3V, Lens Color=Clear, Manufacturer=Kingbright, Manufacturer Part Number=KPT-1608QBC-D, Supplier Part Number 1=2217978, Category=LEDs, Color=Blue, ComponentLink1Description=https://datasheet.ciiva.com/8060/1655865-8060610.pdf?src-supplier=Element14, ComponentLink1URL=https://datasheet.ciiva.com/8060/1655865-8060610.pdf?src-supplier=Element14, Dominant Wavelength=470nm, Lens Style=Rectangular,Diffused,Colorless,Circular, Luminous Intensity=100mcd, Mount="Surface Mount", Number of LEDs=1, Number of Pins=2, Packaging="Tape and Reel", Pricing 1="5=0,24500, 50=0,18500, 100=0,16200, 500=0,13800, 1000=0,13500 (GBP)", Radiation Hardening=No, REACH SVHC="No SVHC", RoHS=Yes, RoHS Compliant=Yes, Series=KPT, Stock 1=483, Supplier 1=Farnell, Viewing Angle=120°, Wavelength=465nm
LD2: library part LED_RED_0603IMP, "LED, Low Power, Red, 630 nm, 1.95 V, 20 mA, 80 mcd", Case/Package=1608, Forward Current=20mA, Forward Voltage=1.95V, Lens Color=Clear, Manufacturer=Kingbright, Manufacturer Part Number=KPH-1608SURCK, Supplier Part Number 1=2426216, Category=Uncategorized, Color=Red, ComponentLink1Description=http://www.farnell.com/datasheets/2046111.pdf?src-supplier=Farnell, ComponentLink1URL=http://www.farnell.com/datasheets/2046111.pdf?src-supplier=Farnell, ComponentLink2Description=http://uk.rs-online.com/webdocs/139f/0900766b8139f351.pdf?src-supplier=RSComponents, ComponentLink2URL=http://uk.rs-online.com/webdocs/139f/0900766b8139f351.pdf?src-supplier=RSComponents, ComponentLink3Description=http://www.farnell.com/datasheets/2046111.pdf?src-supplier=Element14, ComponentLink3URL=http://www.farnell.com/datasheets/2046111.pdf?src-supplier=Element14, Dominant Wavelength=630nm, Lens Style=Rectangular, Luminous Intensity=80mcd, Mount="Surface Mount", Number of LEDs=1, Number of Pins=2, Packaging="Cut Tape", Pricing 1="5=0,14000, 10=0,12500, 25=0,11000, 50=0,10900, 100=0,10700 (GBP)", REACH SVHC="No SVHC", RoHS=Yes, RoHS Compliant=Yes, Stock 1=7125, Supplier 1=Farnell, Viewing Angle=120°, Wavelength=630nm
Q1: library part P-Channel_MOSFET, "Trans MOSFET P-CH 30V 4.2A 3-Pin SOT-23", Case/Package=SOT-23, Continuous Drain Current (ID)=4A, Current Rating=-4A, Drain to Source Resistance=110mR, Drain to Source Voltage (Vdss)=30V, Dual Supply Voltage=-30V, Gate to Source Voltage (Vgs)=20V, Input Capacitance=630pF, Manufacturer=BORN, Max Operating Temperature=150°C, Max Power Dissipation=1.1W, Min Operating Temperature=-55°C, On-State Resistance=70mR, Package Quantity=3000, Power Dissipation=1.4W, Supplier Part Number 1=C15127, Threshold Voltage=-1V, Category=MOSFETs, ComponentLink1Description=Datasheet, ComponentLink1URL=https://datasheet.lcsc.com/lcsc/1912111437_BORN-AO3401A_C306862.pdf, ComponentLink2Description="Supplier Link", ComponentLink2URL=https://lcsc.com/product-detail/MOSFET_BORN-AO3401A_C306862.html, Fall Time=2.87ns, Height=1.3mm, Lead Free="Lead Free", Length=3.1mm, Manufacturer Part Number=AO3401A, Mount="Surface Mount", Nominal Vgs=-800mV, Number of Channels=1, Number of Elements=1, Number of Pins=3, Packaging="Tape and Reel", Pricing 1="1=0,62800, 10=0,50000, 100=0,32600, 500=0,27400, 1000=0,24300, 5000=0,21100 (GBP)", Radiation Hardening=No, Rds On Max=70mR, REACH SVHC="No SVHC", Rise Time=2.87ns, RoHS=Yes, Stock 1=305, Supplier 1=LCSC, Termination=SMD/SMT, Turn-Off Delay Time=29.2ns, Turn-On Delay Time=1.74ns, Voltage Rating (DC)=-30V, Weight=0.000529oz, Width=1.8mm
R1: library part Resistor_47R_0805IMP, "RES, THICK FILM, 47OHM, 1%, 0.125W", Case Code (Imperial)=0805, Case Code (Metric)=2012, Manufacturer=Multicomp, Manufacturer Part Number=MCWR08X47R0FTL, Power Rating=125mW, Resistor Type="Thick Film", Supplier Part Number 1=2447666, Temperature Coefficient=100ppm/°C, Tolerance=1%, Voltage Rating=150V, Case/Package=0805, ComponentLink1Description=https://datasheet.ciiva.com/46398/1849611-46398382.pdf?src-supplier=Element14, ComponentLink1URL=https://datasheet.ciiva.com/46398/1849611-46398382.pdf?src-supplier=Element14, ComponentLink2Description=https://datasheet.ciiva.com/46398/1849611-46398383.pdf?src-supplier=Element14, ComponentLink2URL=https://datasheet.ciiva.com/46398/1849611-46398383.pdf?src-supplier=Element14, Packaging="Cut Tape", Pricing 1="10=0,00850, 100=0,00730, 500=0,00610, 1000=0,00450, 2500=0,00380 (GBP)", REACH SVHC="No SVHC", Resistance=47R, RoHS=Yes, Stock 1=73470, Supplier 1=Farnell, Voltage Rating (DC)=150V
R2: library part Resistor_1K5_0805IMP, "RES, 1K5, 1%, 0.125W, 0805", Case Code (Imperial)=0805, Case Code (Metric)=2012, Manufacturer=Multicomp, Manufacturer Part Number=MCWR08X1501FTL, Power Rating=125mW, Resistor Type="Thick Film", Supplier Part Number 1=2447592, Temperature Coefficient=100ppm/°C, Tolerance=1%, Voltage Rating=150V, Case/Package=0805, Category=Uncategorized, ComponentLink1Description=http://www.farnell.com/datasheets/2563624.pdf?src-supplier=Farnell, ComponentLink1URL=http://www.farnell.com/datasheets/2563624.pdf?src-supplier=Farnell, ComponentLink2Description=http://www.farnell.com/datasheets/1849611.pdf?src-supplier=Element14, ComponentLink2URL=http://www.farnell.com/datasheets/1849611.pdf?src-supplier=Element14, Mount="Surface Mount", Packaging="Tape and Reel", Pricing 1="10=0,00840, 100=0,00720, 500=0,00600, 1000=0,00440, 2500=0,00360 (GBP)", REACH SVHC=Unknown, Resistance=1.5kR, RoHS=Yes, Stock 1=45138, Supplier 1=Farnell, Voltage Rating (DC)=150V
R3 R4: library part Resistor_2K2_0805IMP, "Resistor 2.2 kohm, 125 mW, - 1%, 150 V", Case Code (Imperial)=0805, Case Code (Metric)=2012, Manufacturer=Multicomp, Manufacturer Part Number=MCWR08X2201FTL, Power Rating=125mW, Resistor Type="Thick Film", Supplier Part Number 1=2447623, Temperature Coefficient=100ppm/°C, Tolerance=1%, Voltage Rating=150V, Case/Package=0805, Category=Uncategorized, ComponentLink1Description=http://www.farnell.com/datasheets/2563624.pdf?src-supplier=Farnell, ComponentLink1URL=http://www.farnell.com/datasheets/2563624.pdf?src-supplier=Farnell, ComponentLink2Description=http://www.farnell.com/datasheets/1849611.pdf?src-supplier=Element14, ComponentLink2URL=http://www.farnell.com/datasheets/1849611.pdf?src-supplier=Element14, Mount="Surface Mount", Packaging="Tape and Reel", Pricing 1="10=0,00900, 100=0,00780, 500=0,00650, 1000=0,00480, 2500=0,00400 (GBP)", REACH SVHC=Unknown, Resistance=2.2kR, RoHS=Yes, Stock 1=54745, Supplier 1=Farnell, Voltage Rating (DC)=150V
R5: library part Resistor_10K_0805IMP, "SMD Chip Resistor, Thick Film, 10 kohm, 150 V, 0805 [2012 Metric], 125 mW,  1%,", Case Code (Imperial)=0805, Case Code (Metric)=2012, Manufacturer=Multicomp, Manufacturer Part Number=MCWR08X1002FTL, Power Rating=125mW, Resistor Type="Thick Film", Supplier Part Number 1=2447553, Temperature Coefficient=100ppm/°C, Tolerance=1%, Voltage Rating=150V, Case/Package=0805, Category=Uncategorized, ComponentLink1Description=https://datasheet.ciiva.com/46381/1849611-46381605.pdf?src-supplier=Element14, ComponentLink1URL=https://datasheet.ciiva.com/46381/1849611-46381605.pdf?src-supplier=Element14, Mount="Surface Mount", Packaging="Cut Tape", Pricing 1="10=0,00840, 100=0,00720, 500=0,00600, 1000=0,00440, 2500=0,00360 (GBP)", REACH SVHC=Unknown, Resistance=10kR, RoHS=Yes, Stock 1=135476, Supplier 1=Farnell, Voltage Rating (DC)=150V
R6: library part Resistor_47K_0805IMP, "Res 47K 1% 0.125W 0805", Case Code (Imperial)=0805, Case Code (Metric)=2012, Manufacturer=Multicomp, Manufacturer Part Number=MCWR08X4702FTL, Power Rating=125mW, Resistor Type="Thick Film", Supplier Part Number 1=2447664, Temperature Coefficient=100ppm/°C, Tolerance=1%, Voltage Rating=150V, Case/Package=0805, Category=Uncategorized, ComponentLink1Description=https://datasheet.ciiva.com/46398/1849611-46398213.pdf?src-supplier=Element14, ComponentLink1URL=https://datasheet.ciiva.com/46398/1849611-46398213.pdf?src-supplier=Element14, Mount="Surface Mount", Packaging="Cut Tape", Pricing 1="10=0,00890, 100=0,00770, 500=0,00640, 1000=0,00460, 2500=0,00390 (GBP)", REACH SVHC="No SVHC", Resistance=47kR, RoHS=Yes, Stock 1=322325, Supplier 1=Farnell, Voltage Rating (DC)=150V
R7: library part Resistor_15K_0805IMP, "RES, THICK FILM, 15KOHM,125mW, 1%, 0805 [2012 Metric]", Case Code (Imperial)=0805, Case Code (Metric)=2012, Manufacturer=Multicomp, Manufacturer Part Number=MCWR08X1502FTL, Power Rating=125mW, Resistor Type="Thick Film", Supplier Part Number 1=2447575, Temperature Coefficient=100ppm/°C, Tolerance=1%, Voltage Rating=150V, Case/Package=0805, ComponentLink1Description=https://datasheet.ciiva.com/46398/1849611-46398216.pdf?src-supplier=Element14, ComponentLink1URL=https://datasheet.ciiva.com/46398/1849611-46398216.pdf?src-supplier=Element14, ComponentLink2Description=https://datasheet.ciiva.com/46398/1849611-46398217.pdf?src-supplier=Element14, ComponentLink2URL=https://datasheet.ciiva.com/46398/1849611-46398217.pdf?src-supplier=Element14, Packaging="Cut Tape", Pricing 1="10=0,00810, 100=0,00700, 500=0,00580, 1000=0,00430, 2500=0,00350 (GBP)", REACH SVHC="No SVHC", Resistance=15kR, RoHS=Yes, Stock 1=122784, Supplier 1=Farnell, Voltage Rating (DC)=150V
R8: library part Resistor_270R_0805IMP, "RES, THICK FILM, 270 OHM, 1%, 0.125W", Case Code (Imperial)=0805, Case Code (Metric)=2012, Manufacturer=Multicomp, Manufacturer Part Number=MCWR08X2700FTL, Power Rating=125mW, Resistor Type="Thick Film", Supplier Part Number 1=2447618, Temperature Coefficient=100ppm/°C, Tolerance=1%, Voltage Rating=150V, Case/Package=0805, ComponentLink1Description=https://datasheet.ciiva.com/46398/1849611-46398601.pdf?src-supplier=Element14, ComponentLink1URL=https://datasheet.ciiva.com/46398/1849611-46398601.pdf?src-supplier=Element14, ComponentLink2Description=https://datasheet.ciiva.com/46398/1849611-46398600.pdf?src-supplier=Element14, ComponentLink2URL=https://datasheet.ciiva.com/46398/1849611-46398600.pdf?src-supplier=Element14, Packaging="Tape and Reel", Pricing 1="10=0,00850, 100=0,00730, 500=0,00610, 1000=0,00450, 2500=0,00380 (GBP)", REACH SVHC=Unknown, Resistance=270R, RoHS=Yes, Stock 1=42351, Supplier 1=Farnell, Voltage Rating (DC)=150V
R9: library part Resistor_100K_0805IMP, "Resistor 100 kohm, 150 V, 0805 [2012 Metric], 125 mW,  1%,", Case Code (Imperial)=0805, Case Code (Metric)=2012, Manufacturer=Multicomp, Manufacturer Part Number=MCWR08X1003FTL, Power Rating=125mW, Resistor Type="Thick Film", Supplier Part Number 1=2447551, Temperature Coefficient=100ppm/°C, Tolerance=1%, Voltage Rating=150V, Case/Package=0805, Category=Uncategorized, ComponentLink1Description=https://datasheet.ciiva.com/46398/1849611-46398805.pdf?src-supplier=Element14, ComponentLink1URL=https://datasheet.ciiva.com/46398/1849611-46398805.pdf?src-supplier=Element14, Mount="Surface Mount", Packaging="Cut Tape", Pricing 1="10=0,00850, 100=0,00730, 500=0,00610, 1000=0,00450, 2500=0,00380 (GBP)", REACH SVHC="No SVHC", Resistance=100kR, RoHS=Yes, Stock 1=102504, Supplier 1=Farnell, Voltage Rating (DC)=150V
R10: library part Resistor_1K_0805IMP, "RES, THICK FILM, 1K, 5%, 0.1W, 0805", Case Code (Imperial)=0805, Case Code (Metric)=2012, Manufacturer=Multicomp, Manufacturer Part Number=MC01W080551K, Max Operating Temperature=155°C, Min Operating Temperature=-55°C, Power Rating=100mW, Resistor Type="Thick Film", Supplier Part Number 1=9333711, Temperature Coefficient=200ppm/°C, Tolerance=5%, Voltage Rating=150V, Case/Package=0805, Category="Chip SMD Resistors", ComponentLink1Description=http://www.farnell.com/datasheets/1716700.pdf?src-supplier=Farnell, ComponentLink1URL=http://www.farnell.com/datasheets/1716700.pdf?src-supplier=Farnell, ComponentLink2Description=http://www.farnell.com/datasheets/1716700.pdf?src-supplier=Element14, ComponentLink2URL=http://www.farnell.com/datasheets/1716700.pdf?src-supplier=Element14, Number of Pins=2, Packaging="Cut Tape", Pricing 1="10=0,00980, 100=0,00850, 500=0,00710, 1000=0,00520, 2500=0,00370, 5000=0,00310, 25000=0,00250, 50000=0,00240 (GBP)", REACH SVHC="No SVHC", Resistance=1kR, RoHS=Yes, Stock 1=82972, Supplier 1=Farnell, Voltage Rating (DC)=150V, Width=1.25mm
R11: library part Resistor_68K_0805IMP, "Resistor, Thick Film, 68 kohm, 125 mW,  1%, 150 V", Case Code (Imperial)=0805, Case Code (Metric)=2012, Manufacturer=Multicomp, Manufacturer Part Number=MCWR08X6802FTL, Power Rating=125mW, Resistor Type="Thick Film", Supplier Part Number 1=2447706, Temperature Coefficient=100ppm/°C, Tolerance=1%, Voltage Rating=150V, Case/Package=0805, ComponentLink1Description=https://datasheet.ciiva.com/46398/1849611-46398590.pdf?src-supplier=Element14, ComponentLink1URL=https://datasheet.ciiva.com/46398/1849611-46398590.pdf?src-supplier=Element14, ComponentLink2Description=https://datasheet.ciiva.com/46398/1849611-46398591.pdf?src-supplier=Element14, ComponentLink2URL=https://datasheet.ciiva.com/46398/1849611-46398591.pdf?src-supplier=Element14, Packaging="Cut Tape", Pricing 1="10=0,00800, 100=0,00690, 500=0,00580, 1000=0,00430, 2500=0,00350 (GBP)", REACH SVHC="No SVHC", Resistance=68kR, RoHS=Yes, Stock 1=9768, Supplier 1=Farnell, Voltage Rating (DC)=150V